# EAGLE board BUZZI-10 (EAGLE 4.15)
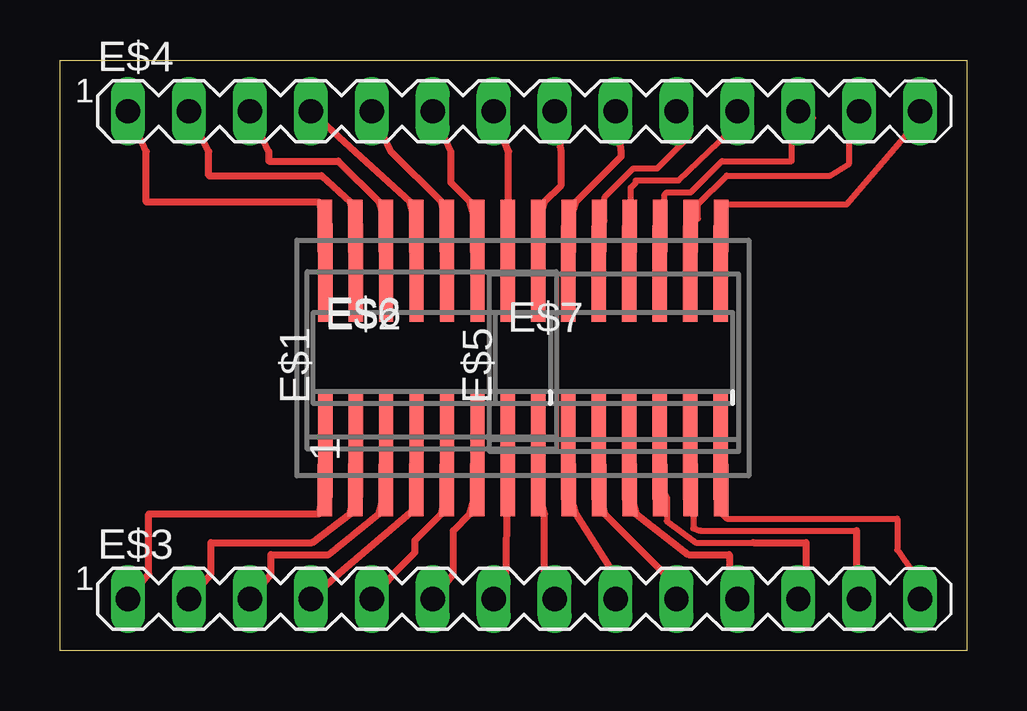
[diagram p0: board, top side]

Size 37.8 x 24.6 mm. Coordinates in mm from the lower left corner, seen from the top.
Outline: 0,24.6 37.8,24.6 37.8,0 0,0 0,24.6
Copper layers (1*16): Top 0.035mm / dielectric 1.5mm / Bottom 0.035mm
Design rules "PCB-POOL": minimum track width 6mil, minimum drill 12mil, track to track 6mil, track to pad 6mil, pad to pad 6mil, via to via 6mil, smd to smd 6mil, copper to edge 20mil, drill to drill 8mil, minimum pad ring 8mil, minimum via ring 6mil, stop-mask expansion 3mil, vias tented up to drill 0mil, thermal gap 8mil
Net classes: 0 default: width 0.3 mm

## Footprints (pad centres in the part's own frame; a part is rotated, then mirrored left to right if it is on the bottom)
SO16 = smd 0.6 x 2.2: 1 -4.445,-2.6; 2 -3.175,-2.6; 3 -1.905,-2.6; 4 -0.635,-2.6; 5 0.635,-2.6; 6 1.905,-2.6; 7 3.175,-2.6; 8 4.445,-2.6; 9 4.445,2.6; 10 3.175,2.6; 11 1.905,2.6; 12 0.635,2.6; 13 -0.635,2.6; 14 -1.905,2.6; 15 -3.175,2.6; 16 -4.445,2.6
SO16W = smd 0.6 x 2.2: 1 -4.445,-4.6; 2 -3.175,-4.6; 3 -1.905,-4.6; 4 -0.635,-4.6; 5 0.635,-4.6; 6 1.905,-4.6; 7 3.175,-4.6; 8 4.445,-4.6; 9 4.445,4.6; 10 3.175,4.6; 11 1.905,4.6; 12 0.635,4.6; 13 -0.635,4.6; 14 -1.905,4.6; 15 -3.175,4.6; 16 -4.445,4.6
MA14-1 = drill 1.016 long: 1 -15.24,0; 2 -12.7,0; 3 -10.16,0; 4 -7.62,0; 5 -5.08,0; 6 -2.54,0; 7 0,0; 8 2.54,0; 9 5.08,0; 10 7.62,0; 11 10.16,0; 12 12.7,0; 13 15.24,0; 14 17.78,0
SOP28 = smd 0.6 x 2.2: 1 -8.255,-5.5; 2 -6.985,-5.5; 3 -5.715,-5.5; 4 -4.445,-5.5; 5 -3.175,-5.5; 6 -1.905,-5.5; 7 -0.635,-5.5; 8 0.635,-5.5; 9 1.905,-5.5; 10 3.175,-5.5; 11 4.445,-5.5; 12 5.715,-5.5; 13 6.985,-5.5; 14 8.255,-5.5; 15 8.255,5.5; 16 6.985,5.5; 17 5.715,5.5; 18 4.445,5.5; 19 3.175,5.5; 20 1.905,5.5; 21 0.635,5.5; 22 -0.635,5.5; 23 -1.905,5.5; 24 -3.175,5.5; 25 -4.445,5.5; 26 -5.715,5.5; 27 -6.985,5.5; 28 -8.255,5.5

## Placement (x,y rotation side)
E$1  [SO16]  15.5,12.2 0 top
E$2  [SO16W]  15.5,12.1 0 top
E$3  [MA14-1]  18.08,2.16 0 top
E$4  [MA14-1]  18.08,22.48 0 top
E$5  [SO16]  23.1,12.2 0 top
E$6  [SOP28]  19.3,12.2 0 top
E$7  [SO16W]  23.1,12 0 top

## Library data of the parts
E$1 E$2 E$5-E$7 = smd-ipc
E$3 E$4 = con-lstb

## Nets
S$1: E$2.16
S$2: E$2.15
S$3: E$2.14
S$4: E$2.13
S$5: E$2.12
S$6: E$2.11
S$7: E$2.10
S$8: E$2.9
S$9: E$2.1
S$10: E$2.2
S$11: E$2.3
S$12: E$2.4
S$13: E$4.1 E$6.28
S$14: E$2.6
S$15: E$2.7
S$16: E$2.8
S$17: E$4.2 E$6.27
S$18: E$4.3 E$6.26
S$19: E$4.4 E$6.25
S$20: E$4.5 E$6.24
S$21: E$4.6 E$6.23
S$22: E$4.7 E$6.22
S$23: E$4.8 E$6.21
S$24: E$4.9 E$6.20
S$25: E$4.10 E$6.19
S$26: E$4.11 E$6.18
S$27: E$4.12 E$6.17
S$28: E$4.13 E$6.16
S$29: E$4.14 E$6.15
S$30: E$3.1 E$6.1
S$31: E$3.2 E$6.2
S$32: E$3.3 E$6.3
S$33: E$3.4 E$6.4
S$34: E$3.5 E$6.5
S$35: E$3.6 E$6.6
S$36: E$3.7 E$6.7
S$37: E$3.8 E$6.8
S$38: E$3.9 E$6.9
S$39: E$3.10 E$6.10
S$40: E$3.11 E$6.11
S$41: E$3.12 E$6.12
S$42: E$3.13 E$6.13
S$43: E$3.14 E$6.14

## Tracks (layer width: path | path; a pad name or v marks a point on that pad's centre or on a via)
S$13
  Top 0.3: E$6.28 10.8,18.7 3.6,18.7 3.6,20.8 E$4.1
S$17
  Top 0.3: E$6.27 12.1,18.7 10.9,19.8 6.2,19.8 6.2,20.8 E$4.2
S$18
  Top 0.3: E$6.26 13.3,18.7 11.6,20.4 8.7,20.4 8.7,20.8 E$4.3
S$19
  Top 0.3: E$6.25 14.6,18.7 11.4,21.6 E$4.4
S$20
  Top 0.3: E$6.24 15.9,18.7 13.8,20.8 E$4.5
S$21
  Top 0.3: E$6.23 17.1,18.7 16.3,19.5 16.3,20.8 E$4.6
S$22
  Top 0.3: E$6.22 18.7,18.7 18.7,20.8 E$4.7
S$23
  Top 0.3: E$6.21 20.2,18.7 20.9,19.4 20.9,20.8 E$4.8
S$24
  Top 0.3: E$6.20 21.5,18.7 23.4,20.6 23.4,20.8 E$4.9
S$25
  Top 0.254: E$6.19 22.7,17.93 22.7,18.9 23.9,20.1 24.9,20.1 26.2,21.4 26.2,22.22 | 26.2,22.22 26.2,22.3 | 26.2,22.22 E$4.10
S$26
  Top 0.254: E$6.18 23.8,17.76 23.8,19.3 24,19.5 24,19.6 25.8,19.6 27.9,21.6 27.9,22.4 E$4.11 28.8,22.2
S$27
  Top 0.254: E$6.17 25.2,17.88 25.2,19 25.3,19.1 26.3,19.1 27.6,20.4 30.5,20.4 30.5,22 E$4.12 31.4,22.2
S$28
  Top 0.254: E$6.16 26.6,18.02 26.6,18.6 27.8,19.8 32.1,19.8 32.9,20.3 32.9,22.3 E$4.13 33.5,22.1
S$29
  Top 0.254: E$6.15 27.6,17.75 27.6,18.6 32.8,18.6 35.8,22.1 E$4.14
S$30
  Top 0.3: E$6.1 10.8,5.7 3.7,5.7 3.7,3.2 E$3.1
S$31
  Top 0.3: E$6.2 12.1,5.7 10.5,4.5 6.3,4.5 6.3,3.2 E$3.2
S$32
  Top 0.3: E$6.3 13.3,5.7 11.2,4 8.8,4 8.8,3.2 E$3.3
S$33
  Top 0.3: E$6.4 14.9,6 11.5,3.1 E$3.4
S$34
  Top 0.3: E$6.5 15.9,5.7 14.8,4.6 14.8,4.1 13.9,3.2 E$3.5
S$35
  Top 0.3: E$6.6 17.1,5.7 16.4,5 16.4,3.2 E$3.6
S$36
  Top 0.3: E$6.7 18.6,2.8 E$3.7
S$37
  Top 0.3: E$6.8 20.2,5.7 20.2,3.3 E$3.8
S$38
  Top 0.3: E$6.9 21.5,5.7 23.1,3.2 E$3.9
S$39
  Top 0.3: E$6.10 22.7,5.7 25.7,2.7 E$3.10
S$40
  Top 0.3: E$6.11 24,5.7 26.2,4 27.9,4 27.9,2.9 28.3,2.9 E$3.11
S$41
  Top 0.254: E$6.12 25.3,6.41 25.3,5.4 26.5,4.5 28.9,4.5
  Top 0.3: E$3.12 31.1,2.7 31.1,4.5 28.9,4.5
S$42
  Top 0.254: E$6.13 26.4,6.59 26.4,5.1 26.7,5 33.2,5
  Top 0.3: E$3.13 33.2,3 33.2,5
S$43
  Top 0.254: E$6.14 27.5,6.65 27.5,5.8 27.8,5.5 34.9,5.5 34.9,4.2 36,2.6 35.9,2.18 E$3.14